# Altium PCB AMRadio.PcbDoc
Units mil, origin at the board's own origin, x right, y up, seen from the top; angles counter-clockwise.
Board outline 1080 x 3090 mil, 2 copper layers (Top Layer, Bottom Layer); 50 components, 30 nets, 125 pads, 27 vias.
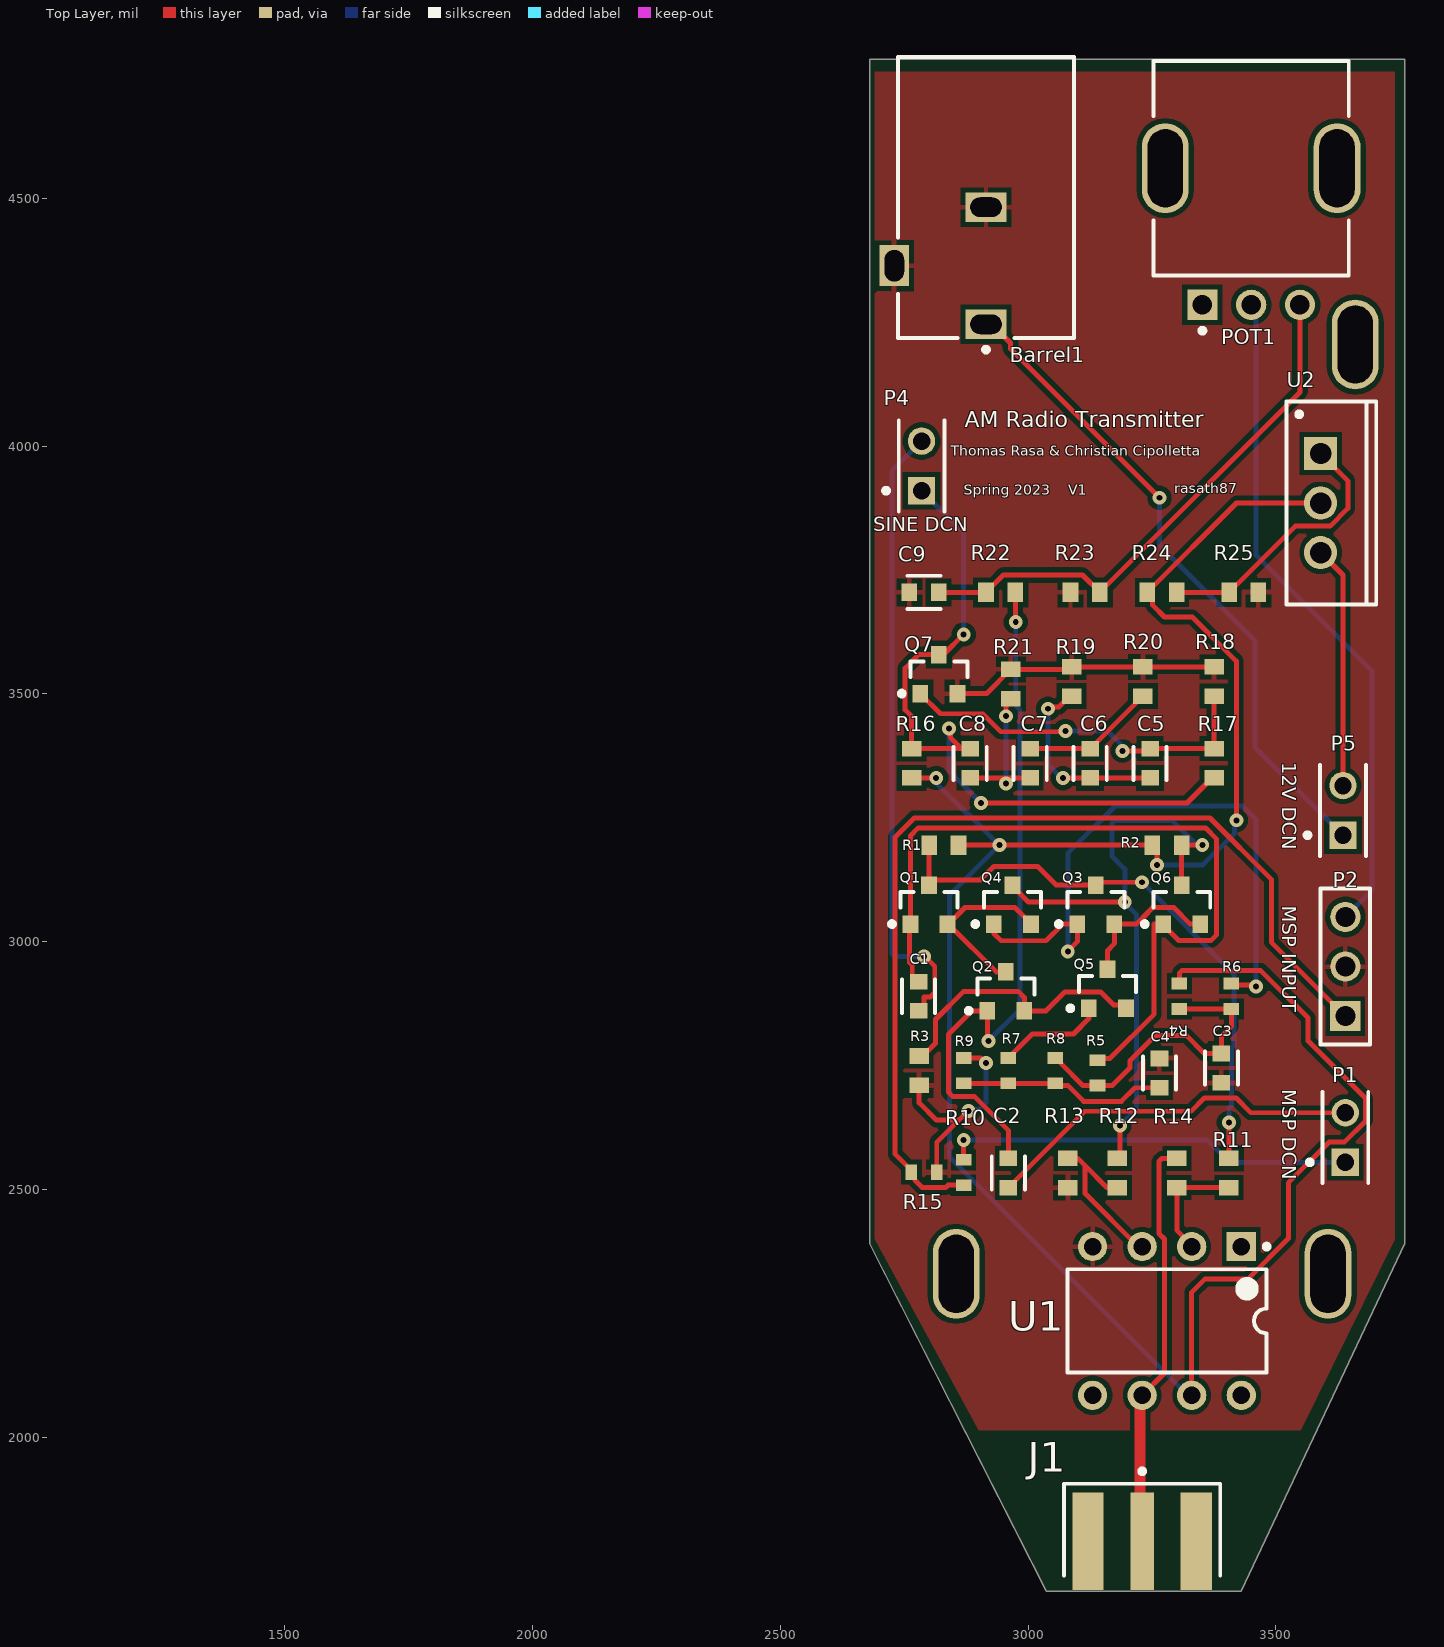
[diagram p0: Top Layer view]
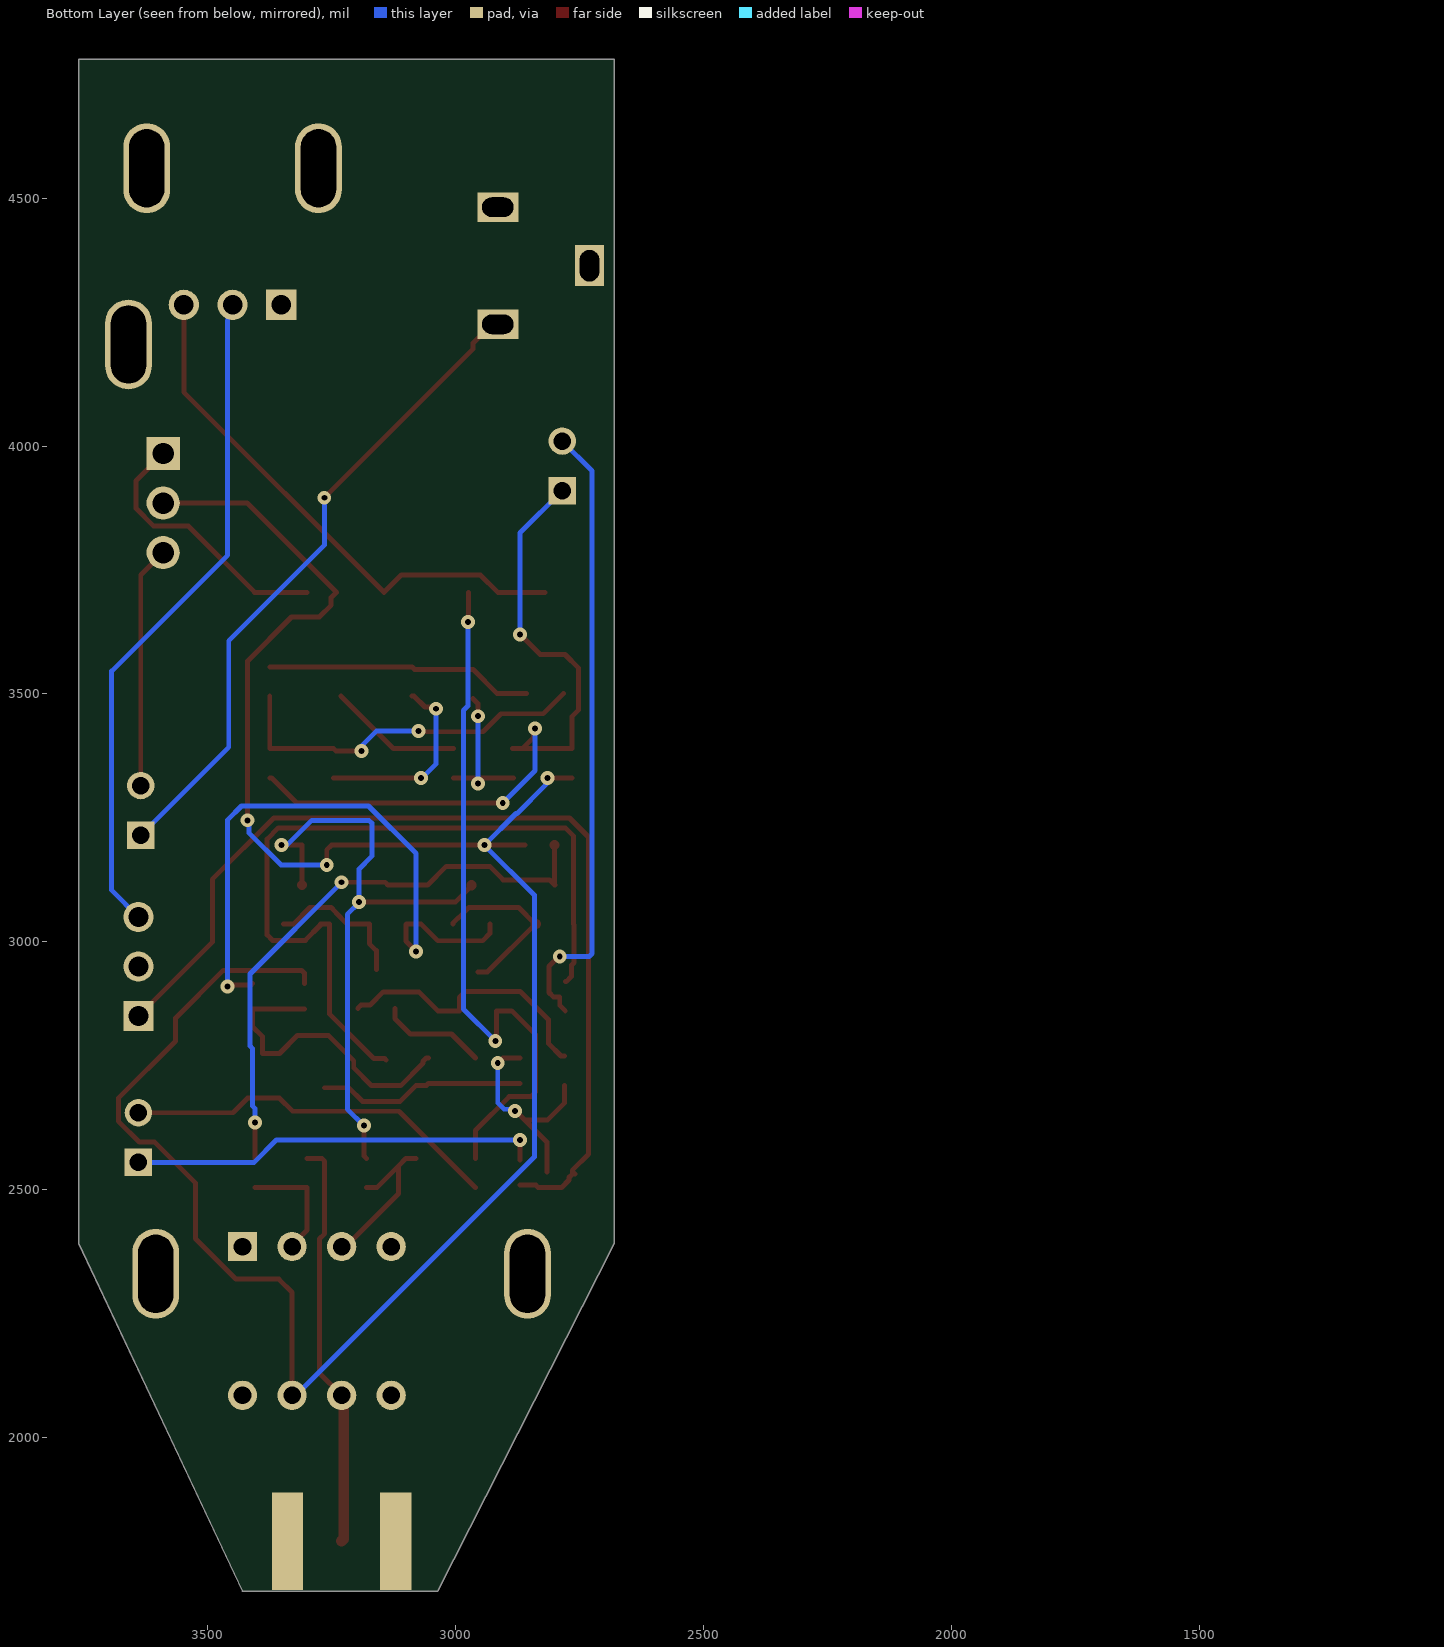
[diagram p1: Bottom Layer view, seen from below]

## Layer stack, top to bottom
Top Solder: solder mask 0.4, Solder Resist, Dk 3.5
Top Layer: signal copper 1.4
Dielectric 1: dielectric 12.6, FR-4, Dk 4.8
Bottom Layer: signal copper 1.4
Bottom Solder: solder mask 0.4, Solder Resist, Dk 3.5

## Board outline
2680,2391.1 3036.4,1690 3430.08,1690 3760,2391.1 3760,4780 2680,4780

## Design rules (kind name [scope] priority, off if disabled: settings)
Clearance [All] p1: gap=10 ignorepadtopadclearanceinfootprint=FALSE except(0: Arc-Hole Track-Hole SMDPad-Hole THPad-Hole Via-Hole Fill-Hole Poly-Hole Region-Hole Text-Hole; 8: Arc-THPad Track-THPad SMDPad-THPad THPad-THPad)
PolygonConnect [All] p1: connectstyle=Relief reliefconductorwidth=10 reliefentries=4 polygonreliefangle="90 Angle" airgapwidth=10
RoutingVias [All] p1: holewidth=12 width=28 viastyle="Through Hole" minholewidth=7.87 minwidth=26 maxholewidth=20 maxwidth=28
SilkToSilkClearance [All] p1: silktosilkclearance=2
SolderMaskExpansion [All] p1: expansion=4 istentingtop=FALSE
Width [All] p1: maxlimit=23.94 minlimit=10 preferedwidth=10 bottomlayer_maxwidth=20 minimp=50.000000 maximp=50.000000 favimp=50.000000
29 further rules are at their usual default settings.

## Components (designator, comment, footprint, x,y, rotation, side; value= is the part's Value field where it differs from the comment)
Barrel1 "PJ-102BH" CUI-PJ-102BH_V 2915,4363.82 r90 top
C1 "CC0603KRX7R8BB104" FP-CC0603-DA-MFG 2778.88,2890 r90 top value="100 nF"
C2 "CC0603KRX7R8BB104" FP-CC0603-DA-MFG 2960,2533.39 r90 top value="100 nF"
C3 "CC0603KRX7R8BB104" FP-CC0603-DA-MFG 3390,2745 r270 top value="100 nF"
C4 "CC0603KRX7R8BB104" FP-CC0603-DA-MFG 3265,2735 r90 top value="100 nF"
C5 "CC0603KRX7R8BB104" FP-CC0603-DA-MFG 3246.05,3360 r90 top value="100 nF"
C6 "CC0603KRX7R8BB104" FP-CC0603-DA-MFG 3125.05,3360 r270 top value="100 nF"
C7 "CC0603KRX7R8BB104" FP-CC0603-DA-MFG 3004.05,3360 r90 top value="100 nF"
C8 "CC0603KRX7R8BB104" FP-CC0603-DA-MFG 2883.05,3360 r90 top value="100 nF"
C9 "CC0603KRX7R8BB104" FP-CC0603-DA-MFG 2790,3705 r180 top value="100 nF"
J1 "CON-SMA-EDGE-S" FP-CON-SMA-EDGE-S-MFG 3230,1505 r180 top
P1 "5-146280-2" TECO-5-146280-2_V 3640,2605 r90 top
P2 "TSW-103-07-F-S" SMTC-TSW-103-07-X-S 3640,2850 r90 top
P4 "5-146280-2" TECO-5-146280-2_V 2785,3960 r90 top
P5 "5-146280-2" TECO-5-146280-2_V 3635.26,3265 r90 top
POT1 "PTV09A-4020U-B103" FP-PTV09A-4-MFG 3450,4560.59 r0 top value=10kΩ
Q1 "MMBT2222ALT1G" ONSC-SOT-23-3-318-08_V 2800,3075 r90 top
Q2 "MMBT2222ALT1G" ONSC-SOT-23-3-318-08_V 2955,2900 r90 top
Q3 "MMBT2222ALT1G" ONSC-SOT-23-3-318-08_V 3136.67,3075 r90 top
Q4 "MMBT2222ALT1G" ONSC-SOT-23-3-318-08_V 2968.33,3075 r90 top
Q5 "MMBT2222ALT1G" ONSC-SOT-23-3-318-08_V 3160,2905 r90 top
Q6 "MMBT2222ALT1G" ONSC-SOT-23-3-318-08_V 3310,3075 r90 top
Q7 "MMBT2222ALT1G" ONSC-SOT-23-3-318-08_V 2820,3540 r90 top
R1 "RC0603FR-07220RL" RESC1608X55X25ML10T15 2830,3195 r180 top
R2 "RC0603FR-07220RL" RESC1608X55X25ML10T15 3280,3195 r0 top
R3 "RC0603FR-07220RL" RESC1608X55X25ML10T15 2780,2740 r270 top
R4 "RC0603FR-072K4L" RESC1608X55X25LL10T15 3305,2890 r90 top
R5 "RC0603FR-072K4L" RESC1608X55X25LL10T15 3140,2735.59 r270 top
R6 "RC0603FR-072K4L" RESC1608X55X25LL10T15 3410,2890 r270 top
R7 "RC0603FR-072K4L" RESC1608X55X25LL10T15 2960,2740 r270 top
R8 "RC0603FR-072K4L" RESC1608X55X25LL10T15 3055,2740 r270 top
R9 "RC0603FR-072K4L" RESC1608X55X25LL10T15 2870,2740 r90 top
R10 "RC0603FR-072K4L" RESC1608X55X25LL10T15 2870,2534.41 r270 top
R11 "RC0603FR-07220RL" RESC1608X55X25ML10T15 3405,2533.39 r270 top
R12 "RC0603FR-07220RL" RESC1608X55X25ML10T15 3180,2533.39 r270 top
R13 "RC0603FR-07220RL" RESC1608X55X25ML10T15 3080,2533.39 r270 top
R14 "RC0603FR-07220RL" RESC1608X55X25ML10T15 3300,2533.39 r90 top
R15 "RC0603FR-072K4L" RESC1608X55X25LL10T15 2790,2535 r180 top
R16 "RC0603FR-07220RL" RESC1608X55X25ML10T15 2765,3360 r90 top
R17 "RC0603FR-07220RL" RESC1608X55X25ML10T15 3375,3360 r90 top
R18 "RC0603FR-07220RL" RESC1608X55X25ML10T15 3375,3525 r90 top
R19 "RC0603FR-07220RL" RESC1608X55X25ML10T15 3087.85,3525 r90 top
R20 "RC0603FR-07220RL" RESC1608X55X25ML10T15 3231.43,3525 r90 top
R21 "RC0603FR-07220RL" RESC1608X55X25ML10T15 2965,3520 r90 top
R22 "RC0603FR-07220RL" RESC1608X55X25ML10T15 2944.53,3705 r180 top
R23 "RC0603FR-07220RL" RESC1608X55X25ML10T15 3115,3705 r180 top
R24 "RC0603FR-07220RL" RESC1608X55X25ML10T15 3270,3705 r0 top
R25 "RC0603FR-07220RL" RESC1608X55X25ML10T15 3435,3705 r0 top
U1 "LM741CN/NOPB" P0008A 3280,2235 r270 top
U2 "LM317T" TO-220 3590,3885 r270 top

## Footprints (in the part's own frame and the unit in brackets; to place one, negate y for a bottom-side part, rotate by r counter-clockwise, add the part's x,y. Pads: shape width x height; smd on the part's side, far side on the other; paste and mask are expansions set on the pad)
CUI-PJ-102BH_V [mm] "THD, 3-Leads, Body 14.4x9mm, Height 11mm"
  rect 1.5x2.1 hole 1 slot 1.6 at 90 deg: 1(-3,0) 2(3,0)
  rect 2.1x1.5 hole 1 slot 1.6 at 0 deg: 3(0,4.7)
  silkscreen extent -4.42,-4.5 10.7,4.5, body extent -3.7,-4.5 10.7,4.9, height 11
FP-CC0603-DA-MFG [mm]
  rect 0.8x0.9 smd paste+0 mask+0: 1(-0.75,0) 2(0.75,0)
  silkscreen extent -0.85,-0.85 0.85,0.85, body extent -1.35,-0.75 1.35,0.75, height 0.25
FP-CON-SMA-EDGE-S-MFG [mm]
  rect 1.2x5 smd paste+0 mask+0: 1(0,-7.26)
  rect 1.6x5 smd paste+0 mask+0: 2(-2.77,-7.26) 3(2.77,-7.26)
  rect 1.6x5 smd far side paste+0 mask+0: 4(-2.77,-7.26) 5(2.77,-7.26)
  silkscreen extent -4,-10.96 4,-5.5, body extent -3.67,-9.86 3.67,4.86, height 0.25
FP-PTV09A-4-MFG [mm]
  rect 1.55x1.55 hole 1 paste-1000 mask+0: 1(-2.5,-7)
  round 1.55 hole 1 paste-1000 mask+0: 2(0,-7) 3(2.5,-7)
  rrect100% 2.4x4.6 hole 4 slot 1.8 at 0 deg paste-1000 mask+0: 4(-4.4,0) 5(4.4,0)
  silkscreen extent -5,-8.45 5,5.5, body extent -5.8,-7.88 5.8,5.6, height 0.25
ONSC-SOT-23-3-318-08_V [mm] "SOT23, 3-Leads, Body 2.92x1.3mm, Pitch 0.95mm"
  rect 0.9x0.8 smd: 1(-1,0.95) 2(-1,-0.95) 3(1,0)
  silkscreen extent -1.12,-1.46 0.65,2.02, body extent -0.65,-1.46 0.65,1.46, height 1.11
P0008A [mm] "DIP, 8-Leads, Body 10.15x6.6mm, Pitch 2.54mm"
  rect 1.5x1.5 hole 0.9: 1(-3.81,3.81)
  round 1.5 hole 0.9: 2(-3.81,1.27) 3(-3.81,-1.27) 4(-3.81,-3.81) 5(3.81,-3.81) 6(3.81,-1.27) 7(3.81,1.27) 8(3.81,3.81)
  silkscreen extent -3.93,-5.1 2.65,5.24, body extent -3.95,-5.07 3.95,5.07, height 5.08
RESC1608X55X25LL10T15 [mm] "Chip Resistor, 2-Leads, Body 1.60x0.80mm, IPC High Density"
  rect 0.6x0.8 smd: 1(-0.65,0) 2(0.65,0)
  body extent -0.85,-0.45 0.85,0.45, height 0.55
RESC1608X55X25ML10T15 [mm] "Chip Resistor, 2-Leads, Body 1.70x0.90mm, IPC Low Density"
  rect 0.8x1 smd: 1(-0.75,0) 2(0.75,0)
  body extent -0.85,-0.45 0.85,0.45, height 0.55
SMTC-TSW-103-07-X-S [mm] ".025 SQ Post Terminal Strip Assembly, 1x3 Pins, Vertical, 2.54mm Pitch, Male"
  rect 1.55x1.55 hole 1.02: 1(0,0)
  round 1.55 hole 1.02: 2(2.54,0) 3(5.08,0)
  silkscreen extent -1.46,-1.27 6.54,1.27, body extent -1.27,-1.27 6.35,1.27, height 8.38
TECO-5-146280-2_V [mm] "Connector, 2-Leads, Body 4.67x2.34mm, Pitch 2.54mm"
  rect 1.4x1.4 hole 0.89: 1(-1.27,0)
  round 1.4 hole 0.89: 2(1.27,0)
  silkscreen extent -2.34,-1.17 2.34,1.94, body extent -2.34,-1.17 2.34,1.17, height 5.33
TO-220 [mm] "TO, Thru-Hole, Vertical, Heatsink Mounted; 3 In-Line Leads; Pitch 2.54 mm"
  rect 1.7x1.7 hole 1.1: 1(-2.54,0)
  round 1.7 hole 1.1: 2(0,0) 3(2.54,0)
  silkscreen extent -5.2,-1.75 5.2,2.85, body extent -5.25,-1.8 5.25,2.9, height 19.7

## Part data
Barrel1: library part CMP-2000-06901-1, "Through Hole Right Angle DC Power Jack, 5 A, 2.5 mm Center Pin, 3 Position, -25 to 85 degC, RoHS, Bulk", Current Rating=5A, Flammability Rating=UL94V-0, Insulation Resistance=100MOhms, Manufacturer=CUIInc., Operating Temperature Range=-25Cto+85C, Package Description="3-Pin Through Hole Device, Body 14.4 x 9 mm, Height 11 mm", Voltage Rating=24V, Brand=CUI, Connector Type=DCPowerJack, Contact Gender=Male, Contact Material=Copper, Contact Plating=Nickel, Datasheet URL=http://www.cui.com/product/resource/pj-102bh.pdf, Datasheet Version="Rev. 1.02, 05/2016", Factory Pack Quantity=280, Housing Material=PolybutyleneTerephthalate(PBT), Inside Contact Diameter=2.5mm, Manufacturer URL=http://www.cui.com/, Mounting Angle=Right, Mounting Style=ThroughHole, Mounting Technology=ThroughHole, Outside Contact Diameter=6.5mm, Package Reference=PJ-102BH, Product=Jacks, Product Category=DCPowerConnectors, RoHS=True, Termination Style=ThroughHole
C1 C2 C3 C4 C5 C6 C7 C8 C9: library part CMP-03422-000234-1, "CAP CER 0.1UF 25V X7R 0603", Capacitance="100 nF", Manufacturer=YAGEO, Package=CC0603-DA, Temperature="-55°C to +125°C", Temperature Characteristic=X7R, Temperature Coefficient=15%, Temperature Range High=+125°C, Temperature Range Low=-55°C, Tolerance=0.1, Voltage="25 V", Automotive=No, Category=Cap, ComponentLink2Description=Datasheet, ComponentLink2URL=http://www.yageo.com/documents/recent/UPY-GPHC_X7R_6.3V-to-50V_18.pdf, Device Class L1="Passive Components", Device Class L2=Capacitors, Device Class L3="Ceramic Capacitors", Digikey Description="CAP CER 0.1UF 25V X7R 0603", Footprint Url=http://www.yageo.com/exep/pages/download/literatures/UPY-C_GEN_24.pdf, Height=0.9mm, Lead Free=Yes, Manufacturer Part Number=CC0603KRX7R8BB104, Material=Ceramic, Mouser Description="CC Series 0603 0.1 uF 25 V ±10% Tolerance X7R SMT Multilayer Ceramic Capacitor", Octopart=https://octopart.com/cc0603krx7r8bb104-yageo-8376534, RoHS=TRUE, Voltage Rating="25 V"
J1: library part CMP-204357-000001-1, "CONN SMA JACK STR EDGE MNT", Frequency=18GHz, Manufacturer="RF Solutions Ltd.", Package=CONN_JACK, Automotive=No, Category=Conn, ComponentLink2Description=Datasheet, ComponentLink2URL=https://www.rfsolutions.co.uk/downloads/1498648656DS-CON-EDGE-SMA-4.pdf, Conn Orientation="Right Angle", Contact Material=Gold, Device Class L1=Connectors, Device Class L2="RF / Coaxial Connectors", Device Class L3=unset, Digikey Description="CONN SMA JACK STR EDGE MNT", Footprint Url=https://forum.upverter.com/uploads/default/original/3X/b/e/be75b907af57498775929d6d9099689c472e0307.pdf, Height=6.35mm, Impedance=50Ω, Is Female=yes, Lead Free=Yes, Manufacturer Part Number=CON-SMA-EDGE-S, Number Of Contacts=1, Octopart=https://octopart.com/con-sma-edge-s-rf+solutions-70967450, RoHS=TRUE, Shielding=true
P1 P4 P5: library part CMP-2000-07492-1, "Male Header, Pitch 2.54 mm, 1 x 2 Position, Height 8.21 mm, Tail Length 3.05 mm, -65 to 105 degC, RoHS, Bulk", Case\/Package=100, Colour=Black, Current Rating=3A, Flammability Rating=UL94V-0, High Temperature Housing=Yes, Manufacturer="TE Connectivity", Max Current Rating=5A, Max Operating Temperature=105degC, Min Operating Temperature=-65degC, Package Description="Male Header, Pitch 2.54 mm, 1 x 2 Position, Height 8.21 mm, Tail Length 3.05 mm", Package Quantity=500, Approvals=CSA, Board Standoff=No(Without), Connector Type=Header, Contact Gender=Male, Contact Material=CopperAlloy, Contact Mating Length=0.23inch, Contact Plating=Matte, Contact Protection=No(Without), Contact Shape=Square, Datasheet URL=http://www.te.com/commerce/DocumentDelivery/DDEController?Action=showdoc&DocId=Customer+Drawing%7F146280%7FH1%7Fpdf%7FEnglish%7FENG_CD_146280_H1.pdf%7F5-146280-2, Datasheet Version="Rev. H1, 08/2016", Depth=2.34mm, Gasket=No(Without), High Speed Serial Data Connector=No, Housing Colour=Black, Housing Material=Polymer, Keyed=No, Length=4.67mm, Manufacturer URL=http://www.te.com/, Mating Alignment=No(Without), Mating Connector Lock=No(Without), Mating Post Length=0.23inch, Mount=ThroughHole, Mounting Technology=ThroughHole, Number Of Contacts=2, Number of Positions=2, Number Of Rows=1, Orientation=Straight, Package Reference=5-146280-2, Packaging=Carton, Panel Mount Retention=No(Without), PCB Mount Retention=Without, PCB Mounting Orientation=Vertical, PCB Thickness=0.063inch, Pitch=2.54mm, Radiation Hardening=No, RoHSCompliant=true, Row Spacing=2.54mm, Selectively Loaded=No(Without), Stabilizers=No(Without), Termination=ThroughHole, Termination Post Length=0.12inch
P2: library part CMP-1024-00331-1, "0.025\" SQ Post Header, Through-hole, Vertical, -55 to 125 degC, 2.54 mm Pitch, 3-Pin, Male, RoHS", Manufacturer=Samtec, Temperature Range="-55 to 125 degC", ComponentLink1Description="Manufacturer URL", ComponentLink1URL=http://www.samtec.com, ComponentLink2Description=Datasheet, ComponentLink2URL=http://www.samtec.com/documents/webfiles/pdf/TSW_TH.PDF, ComponentLink3Description="Package Specification", ComponentLink3URL=http://www.samtec.com/documents/webfiles/cpdf/TSW-XXX-XX-XXX-X-XX-XXX-MKT.pdf, DatasheetVersion=F-214, Mounting Technology=Through-hole, Orientation=Vertical, PackageDescription=".025[0.64] SQ. Post Terminal Strip Assembly", PackageReference=TSW-103-07-X-S, PackageVersion="DM, 8/1988", PartNumber=TSW-103-07-F-S, Pitch="2.54 mm", RoHS=True
POT1: library part CMP-07234-000013-1, "POT 10K OHM 1/20W CARBON LINEAR", Manufacturer="Bourns Inc.", Package=PTV09A-4, Power Rating=0.05W, Resistance=10kΩ, Temperature="-10°C to +50°C", Temperature Range High=+50°C, Temperature Range Low=-10°C, Tolerance=20%, Voltage Rating=50V, Automotive=No, Category=Res, ComponentLink2Description=Datasheet, ComponentLink2URL=https://www.bourns.com/docs/product-datasheets/ptv09.pdf?sfvrsn=5e1089f1_12, Composition=Carbon, Device Class L1="Passive Components", Device Class L2=Resistors, Device Class L3="Variable Resistors and Potentiometers", Digikey Description="POT 10K OHM 1/20W CARBON LINEAR", Height=20.5mm, Lead Free=Yes, Manufacturer Part Number=PTV09A-4020U-B103, Mouser Description="Potentiometers 10K LINEAR 20%", Octopart=https://octopart.com/ptv09a-4020u-b103-bourns-1878033, RoHS=TRUE, Series=PTV09
Q1 Q2 Q3 Q4 Q5 Q6 Q7: library part CMP-1048-00538-1, "General Purpose Transistor, NPN Silicon, 3-Pin SOT-23, Pb-Free, Tape and Reel", Manufacturer="On Semiconductor", ComponentLink1Description="Manufacturer URL", ComponentLink1URL=http://www.onsemi.com/, ComponentLink2Description=Datasheet, ComponentLink2URL=http://www.onsemi.cn/pub_link/Collateral/MMBT2222LT1-D.PDF, ComponentLink3Description="Package Specification", ComponentLink3URL=http://www.onsemi.cn/pub_link/Collateral/318-08.PDF, DatasheetVersion="Rev. 10", fT Min (MHz)=300, IC Continuous (A)=0.6, Mounting Technology="Surface Mount", PackageDescription="3-Pin Small Outline Transistor, Body 2.92 x 1.3 mm, Pitch 0.95 mm", PackageReference=SOT-23-3-318-08, PackageVersion="Rev. AP, 11/2009", Packing="Tape and Reel", PartNumber=MMBT2222ALT1G, Polarity=NPN, RoHS=TRUE
R1 R2 R3 R11 R12 R13 R14 R16 R17 R18 R19 R20 R21 R22 R23: library part CMP-1659-00018-2, "General Purpose Chip Resistors, 220 Ohm, +/- 1%, -55 to 155 degC, 0603 (1608 Metric), RoHS, Tape and Reel", ComponentLink1Description="Manufacturer URL", ComponentLink1URL=http://www.yageo.com/, ComponentLink2Description=Datasheet, ComponentLink2URL=https://datasheet.ciiva.com/11808/0900766b80f96399-11808136.pdf, DatasheetVersion="Rev. 4, 04/2009", PackageDescription="2-Pin Surface Mount Device, Body 1.6 x 0.8 mm", PackageReference=0603, RoHSCompliant=false
R4 R10 R15: library part CMP-2000-06935-1, "Chip Resistor, 4.7 kOhm, +/- 1%, 0.1 W, -55 to 155 degC, 0603 (1608 Metric), RoHS, Tape and Reel", Manufacturer=Yageo, Operating Temperature=-55°C~155°C, Package / Case=0603(1608Metric), Package Description="2-Pin Surface Mount Device, Body 1.6 x 0.8 mm", Package Reference=0603, Power (Watts)=0.1W,1/10W, Resistance (Ohms)=2.4k, Standard Package=1, Temperature Coefficient=±100ppm/°C, Tolerance=±1%, Catalog Drawings=ThickFilmResistorSide, Category=Resistors, Composition=ThickFilm, Datasheet URL=http://www.yageo.com/documents/recent/PYu-RC_Group_51_RoHS_L_7.pdf, Datasheet Version="Rev. 7, 05/2017", EDA / CAD Models=DownloadfromAcceleratedDesigns, Family=ChipResistor-SurfaceMount, Features=MoistureResistant, Height="0.022\"(0.55mm)", HTML Datasheet=RCSeries,LSuffixDatasheet.html, Kits=PHH4-KIT-ND-RESKIT1K-9.76K1/10W5700PCS, Manufacturer URL=http://www.yageo.com/, Mounting Technology=SurfaceMount, Number of Terminations=2, Online Catalog=RC0603Series, Other Names=311-2.40KHRCT, Packaging=CutTape(CT), PCN Other=RC/AC0603/0805/120622/Jan/2013, Product Training Modules=ChipResistor, Series=RC, Size / Dimension="0.063\"Lx0.031\"W(1.60mmx0.80mm)", Supplier Device Package=0603
R5 R6 R7 R8 R9: library part CMP-2000-06935-1, "Chip Resistor, 2.4 kOhm, +/- 1%, 0.1 W, -55 to 155 degC, 0603 (1608 Metric), RoHS, Tape and Reel", Manufacturer=Yageo, Operating Temperature=-55°C~155°C, Package / Case=0603(1608Metric), Package Description="2-Pin Surface Mount Device, Body 1.6 x 0.8 mm", Package Reference=0603, Power (Watts)=0.1W,1/10W, Resistance (Ohms)=2.4k, Standard Package=1, Temperature Coefficient=±100ppm/°C, Tolerance=±1%, Catalog Drawings=ThickFilmResistorSide, Category=Resistors, Composition=ThickFilm, Datasheet URL=http://www.yageo.com/documents/recent/PYu-RC_Group_51_RoHS_L_7.pdf, Datasheet Version="Rev. 7, 05/2017", EDA / CAD Models=DownloadfromAcceleratedDesigns, Family=ChipResistor-SurfaceMount, Features=MoistureResistant, Height="0.022\"(0.55mm)", HTML Datasheet=RCSeries,LSuffixDatasheet.html, Kits=PHH4-KIT-ND-RESKIT1K-9.76K1/10W5700PCS, Manufacturer URL=http://www.yageo.com/, Mounting Technology=SurfaceMount, Number of Terminations=2, Online Catalog=RC0603Series, Other Names=311-2.40KHRCT, Packaging=CutTape(CT), PCN Other=RC/AC0603/0805/120622/Jan/2013, Product Training Modules=ChipResistor, Series=RC, Size / Dimension="0.063\"Lx0.031\"W(1.60mmx0.80mm)", Supplier Device Package=0603
R24: library part CMP-1659-00018-2, "General Purpose Chip Resistors, 560 Ohm, +/- 1%, -55 to 155 degC, 0603 (1608 Metric), RoHS, Tape and Reel", ComponentLink1Description="Manufacturer URL", ComponentLink1URL=http://www.yageo.com/, ComponentLink2Description=Datasheet, ComponentLink2URL=https://datasheet.ciiva.com/11808/0900766b80f96399-11808136.pdf, DatasheetVersion="Rev. 4, 04/2009", PackageDescription="2-Pin Surface Mount Device, Body 1.6 x 0.8 mm", PackageReference=0603, RoHSCompliant=false
R25: library part CMP-1659-00018-2, "General Purpose Chip Resistors, 5000 Ohm, +/- 1%, -55 to 155 degC, 0603 (1608 Metric), RoHS, Tape and Reel", ComponentLink1Description="Manufacturer URL", ComponentLink1URL=http://www.yageo.com/, ComponentLink2Description=Datasheet, ComponentLink2URL=https://datasheet.ciiva.com/11808/0900766b80f96399-11808136.pdf, DatasheetVersion="Rev. 4, 04/2009", PackageDescription="2-Pin Surface Mount Device, Body 1.6 x 0.8 mm", PackageReference=0603, RoHSCompliant=false
U1: library part CMP-0055-00162-3, "Operational Amplifier, 8-pin MDIP, Pb-Free", Manufacturer="Texas Instruments", Package Reference=P0008A, PackageTopMarking=NSUZXYTTE#*LM*741CN, PowerWise=N, Code_JEDEC=MS-001-BA, ComponentLink1Description="Datasheet URL", ComponentLink1URL=http://www.ti.com/general/docs/lit/getliterature.tsp?genericPartNumber=LM741&fileType=pdf, CompType=Amplifiers, PackageDescription="MDIP, .365 x .250 x .130in, 8 Lead, .100in Pitch", PinCount=8, RoHS=Y
U2: library part CMP-0244-00444-1, "1.5A, 1.2V to 37V Adjustable Voltage Regulator, 3-Pin TO-220", ComponentLink1Description="Manufacturer URL", ComponentLink1URL=http://www.st.com, ComponentLink2Description=Datasheet, ComponentLink2URL=http://www.st.com/internet/com/TECHNICAL_RESOURCES/TECHNICAL_LITERATURE/DATASHEET/CD00000455.pdf, ComponentLink3Description="Package Specification", ComponentLink3URL=http://www.st.com/internet/com/TECHNICAL_RESOURCES/TECHNICAL_LITERATURE/PACKAGE_INFORMATION/CD00004649.pdf, DatasheetVersion=1/11/2011, PackageDescription="TO, Thru-Hole, Vertical, Heatsink Mounted; 3 In-Line Leads; Pitch 2.54 mm", PackageReference=TO-220, PackageVersion=2011

## Free pads (board coordinates)
  rrect100% 94.49x181.1 hole 157.48 slot 70.87 at 0 deg paste-39370.1 mask+0: 2(2855,2330) 2(3605,2330) 2(3660,4205)

## Via types
v1: diameter 28, hole 12, Top Layer to Bottom Layer, 27 vias

## Nets (pads, with @x,y where several pads share a name; then routed paths per layer and width w, separated by ;. In a path a pad name is that pad's centre, name@x,y a point inside that pad or via, vN(x,y) a via of type N, cw(c..) or ccw(c..) an arc to the next point about the centre after c; other vN are vias at no path point)
5V: P2.3 POT1.2 | length 1358.4
  Bottom Layer w10: POT1.2 3459.76,4275.24 3459.76,4253.87 3460,4253.63 3460,3780 3693.95,3546.05 3693.95,3103.95 P2.3
+12: R1.1 R2.1 R4.2 R16.1 R24.1 U1.7 U2.2 | length 4581
  Top Layer w10: R16.1 v1(2814.53,3330.47) ; R1.1 v1(2942,3195) R2.1 3260,3185.47 v1(3260,3155) ; R4.2 3305,2936.54 3310.86,2942.4 3468.61,2942.4 3565,2846.01 3565,2799.89 3680.56,2684.33 3680.56,2638.2 3637.92,2595.56 3607.06,2595.56 3525.11,2513.61 3525.11,2401.32 3443.16,2319.38 3356.56,2319.38 3330,2292.81 U1.7 ; v1(3420,3245) 3420,3566.17 3331.17,3655 3275,3655 3251.06,3678.94 3251.06,3694.41 R24.1 3420.47,3885 U2.2
  Bottom Layer w10: v1(2814.53,3330.47) 2817.97,3327.03 2817.97,3316.74 2875.9,3258.81 2878.19,3258.81 v1(2942,3195) 2841,3094 2841,2566.07 3322.07,2085 U1.7 ; v1(3260,3155) 3352.37,3155 3416.56,3219.19 3416.56,3241.56 v1(3420,3245)
broadMSP: P2.1 R10.2 R15.2 | length 1986.7
  Top Layer w10: R10.2 2838.18,2508.82 2833.61,2504.25 2786.22,2504.25 2771.22,2519.25 2771.22,2524.25 2764.41,2531.06 2759.41,2531.06 2763.35,2535 R15.2 2764.41,2538.94 2731.85,2571.5 2731.85,3211.31 2770.23,3249.69 3366.97,3249.69 3490.73,3125.92 3490.73,2999.27 P2.1
DIFF_1: Q1.3 Q3.3 R1.2 R11.1 | length 1181.9
  Top Layer w10: Q1.3 Q1.3@2800.24,3114.61 ; R1.2@2800.24,3194.76 Q1.3@2800.24,3114.61 ; v1(3230,3120) 3142.3,3120 Q3.3 3056.47,3114.37 3018.75,3152.09 2931.11,3152.09 2904.02,3125 2810.63,3125 Q1.3@2800.24,3114.61 ; R11.1 v1(3405,2635)
  Top Layer w20: R1.2@2800.24,3194.76 R1.2
  Bottom Layer w10: v1(3230,3120) 3415,2935 3415,2789.94 3410,2784.94 3410,2669 3405,2664 v1(3405,2635)
DIFF_2: Q4.3 Q6.3 R2.2 R12.1 | length 1287.3
  Top Layer w10: Q4.3@2968.33,3113.85 2968.33,3112.4 3000.74,3080 v1(3195,3080) ; R12.1 3185,2567.91 v1(3185,2629) ; Q6.3@3309.76,3114.61 3309.53,3114.84 R2.2 v1(3351.35,3195)
  Top Layer w20: Q4.3@2968.33,3113.85 Q4.3 ; Q6.3@3309.76,3114.61 Q6.3
  Bottom Layer w10: v1(3185,2629) 3218.39,2662.39 3218.39,3055.31 3195,3078.7 3195,3146.58 3169.14,3172.44 3169.14,3239.14 3175,3245 3290,3245 3345.68,3189.32 v1(3351.35,3195)
GND: Barrel1.2 Barrel1.3 C3.2 C4.2 C9.2 P2.2 Q7.2 R3.2 R9.2 R13.2 R15.1 R18.2 R19.2 R20.2 R21.2 R23.2 R25.2 U1.4 | length 992.2
  Top Layer w10: R3.2 2780,2675 2815,2640 2860,2640 ; R15.1 2815.59,2595.59 2860,2640 ; Q7.2 2916.1,3500.63 R21.2 3082.85,3549.53 R19.2 R20.2 R18.2 ; R9.2 2904.41,2765.59 v1(2915,2755) ; v1(2880,2658.6) 2878.6,2658.6 2860,2640
  Bottom Layer w10: v1(2880,2658.6) 2883.44,2662.04 2902.04,2662.04 2915,2675 v1(2915,2755)
MSP: C2.1 P1.2 | length 767.2
  Top Layer w10: C2.1 3114.14,2658 3328.81,2658 3355.53,2684.72 3419.5,2684.72 3449.23,2655 P1.2
NetBarrel1_1: Barrel1.1 P5.1 | length 1336
  Top Layer w10: Barrel1.1 2926.81,4245.71 2964.53,4207.99 2964.53,4196.18 v1(3265,3895.71)
  Bottom Layer w10: v1(3265,3895.71) 3265,3800 3457.77,3607.23 3457.77,3392.48 P5.1
NetC1_1: C1.1 P4.2 | length 1269.7
  Top Layer w10: C1.1 2790,2871.59 2790,2888.78 2802.81,2888.78 2811.59,2897.57 2811.59,2950.28 2790,2971.87 v1(2790,2970)
  Bottom Layer w10: P4.2 2725,3950 2725,2975.86 2730.86,2970 v1(2790,2970)
NetC1_2: C1.2 Q1.1 Q6.1 R5.1 | length 1610.1
  Top Layer w10: C1.2 2776.91,2919.53 2766.16,2930.28 2766.16,2952.83 2761,2957.99 2761,3034.03 Q1.1 2762.6,3213.77 2778.51,3229.69 3357.68,3229.69 3380.35,3207.01 3380.35,3013.9 3369.36,3002.91 3303.35,3002.91 3272.6,3033.66 Q6.1 3254.25,3035.63 3254.25,2853.84 3164.89,2764.48 3143.3,2764.48 R5.1
NetC2_2: C2.2 Q2.1 R22.1 | length 1421.2
  Top Layer w10: v1(2920,2800) 2917.6,2802.4 Q2.1 2886.85,2860.63 2839.25,2813.03 2839.25,2696.39 2848.04,2687.6 2892.01,2687.6 2960,2619.61 C2.2 ; R22.1 2974.06,3645.94 v1(2975,3645)
  Bottom Layer w10: v1(2920,2800) 2984,2864 2984,3467.01 2975,3476.01 v1(2975,3645)
NetC3_1: C3.1 R4.1 R5.2 R6.2 R8.1 | length 628.6
  Top Layer w10: R8.1 3058.94,2765.59 3065.75,2758.78 3065.75,2754.84 3110.8,2709.79 R5.2@3139.79,2709.79 ; R5.2 3170,2710 3205.54,2745.54 3205.54,2759.74 3256.79,2811 3319,2811 3355.47,2774.53 C3.1 3390,2809 3410,2829 R6.2 R4.1
NetC4_1: C4.1 R7.2 R8.2 R9.1 | length 421.5
  Top Layer w10: R9.1 R7.2 R8.2 3059.09,2710.32 3079.68,2710.32 3112,2678 3188,2678 3215.47,2705.47 C4.1
NetC5_1: C5.1 C6.2 R19.1 | length 388.2
  Top Layer w10: v1(3040,3470) 3043.44,3473.44 3061.89,3473.44 3083.92,3495.47 R19.1 ; v1(3070,3330) 3124.57,3330 C6.2 3246,3330.43 C5.1
  Bottom Layer w10: v1(3040,3470) 3040,3358.08 3068.08,3330 v1(3070,3330)
NetC5_2: C5.2 Q7.1 R17.2 R18.1 | length 740.2
  Top Layer w10: Q7.1 2823.23,3460 2908.53,3460 2944.91,3423.62 3073.62,3423.62 v1(3075,3425) ; v1(3190,3385) 3241.52,3385 C5.2 R17.2 R18.1
  Bottom Layer w10: v1(3075,3425) 3160,3425 v1@3186.56,3398.44
NetC6_1: C6.1 C7.2 R20.1 | length 271.3
  Top Layer w10: C7.2 C6.1 3125.48,3389.53 R20.1
NetC7_1: C7.1 C8.1 R21.1 | length 308.1
  Top Layer w10: C8.1 v1@2955,3330.47 ; v1(2955,3319) v1@2955,3330.47 ; v1(2955,3455) 2955,3480.47 R21.1 ; C7.1 2990.47,3330.47 v1@2955,3330.47
  Bottom Layer w10: v1(2955,3319) v1(2955,3455)
NetC8_2: C8.2 P4.1 Q7.3 R16.2 R17.1 | length 1478.2
  Top Layer w10: v1(2840,3430) 2843.44,3426.56 2843.44,3411.56 C8.2@2865.47,3389.53 ; v1(2870,3620) 2829.37,3579.37 Q7.3 2779.37,3579.37 2751.85,3551.85 2751.85,3467.91 2765,3454.76 R16.2 C8.2@2865.47,3389.53 ; C8.2@2885.02,3389.53 C8.2@2865.47,3389.53 ; v1(2905,3280) 3320.59,3280 3371.06,3330.47 R17.1
  Bottom Layer w10: P4.1 2870,3825 v1(2870,3620) ; v1(2840,3430) 2840,3345 v1(2905,3280)
NetC9_1: C9.1 POT1.3 R22.2 R23.1 | length 1101.3
  Top Layer w10: C9.1 R22.2 2950,3740 3109.53,3740 R23.1 3548.43,4108.9 POT1.3
NetP1_1: P1.1 R10.1 | length 828.6
  Top Layer w10: R10.1 v1(2870,2600)
  Bottom Layer w10: v1(2870,2600) 3361.62,2600 3406.62,2555 P1.1
NetP5_2: P5.2 U2.3 | length 488.7
  Top Layer w10: U2.3 3635.26,3739.74 P5.2
NetQ1_2: Q1.2 Q2.3 Q4.2 | length 352.6
  Top Layer w10: Q2.3 2935.63,2939.37 2839.37,3035.63 2872.74,3069 2973.27,3069 2993.93,3048.35 2994.99,3048.35 3005.73,3037.6 Q4.2
  Top Layer w20: Q1.2 Q1.2@2839.37,3035.63
NetQ2_2: Q2.2 Q5.2 R3.1 | length 561.4
  Top Layer w10: R3.1 2787.53,2769.53 2813,2795 2813,2843 2870,2900 2980,2900 2992.4,2887.6 Q2.2 3036,2860.63 3074.37,2899 3146,2899 3172.51,2872.49 3190.54,2872.49 Q5.2
NetQ3_1: Q3.1 Q4.1 R6.1 | length 1289.4
  Top Layer w10: Q4.1 2930.93,3016.61 2945.55,3002 3036,3002 3069.63,3035.63 Q3.1 3100,3034.9 3100,3001.01 3080,2981.01 v1(3080,2980) ; R6.1 3412.8,2912.8 3457.2,2912.8 v1(3460,2910)
  Bottom Layer w10: v1(3080,2980) 3080,3178.28 3175.72,3274 3432.01,3274 3460,3246.01 v1(3460,2910)
NetQ3_2: Q3.2 Q5.3 Q6.2 | length 298.4
  Top Layer w10: Q5.3 3160,2982 3174.07,2996.07 Q3.2 3218.42,3035.63 3241.85,3059.06 3241.85,3059.56 3251.29,3069 3294,3069 3327.37,3035.63 Q6.2
NetQ5_1: Q5.1 R7.1 | length 216.1
  Top Layer w10: R7.1 3008.41,2814 3091.6,2814 3122.6,2845 Q5.1
NetR11_2: R11.2 R14.1 U1.2 | length 236.3
  Top Layer w10: U1.2 3330,2387.97 3300,2417.97 R14.1 R11.2
NetR12_2: R12.2 R13.1 U1.3 | length 339.7
  Top Layer w10: R13.1 3100,2562.91 3115,2547.91 ; R12.2 3159.06,2503.86 3115,2547.91 ; U1.3 3222.07,2385 3115,2492.07 3115,2547.91
NetR24_2: R24.2 R25.1 U2.1 | length 549.1
  Top Layer w10: R24.2 R25.1 3539.01,3838.54 3609.25,3838.54 3645,3874.29 3645,3930 U2.1
RF_OUT: J1.1 R14.2 U1.6 | length 831
  Top Layer w10: U1.6 3275,2130 3275,2400.14 3264.14,2411 3264.14,2557.06 3270,2562.91 R14.2
  Top Layer w21.81: J1.1 3225.91,1794.92 3225.91,2080.91 U1.6
pads on no net: J1.2 J1.3 J1.4 J1.5 POT1.1 POT1.4 POT1.5 U1.1 U1.5 U1.8

## Polygon pours and split planes (outlines as drawn)
GND on Top Layer "GND_L01_P000" (solid, remove dead copper, pour order 0): 2690.29,4755 2690.29,2400.79 2900,2014.18 3550.19,2014.18 3740,2400 3740,4755

## Other copper
Top Layer:
  region: 1085,2500
  region: 1085,2500

## Silkscreen, mask and mechanical layers (free items; w line width, h text height)
Top Overlay:
  text "AM Radio Transmitter" at 2871.96,4037.87 h32.44
  text "Thomas Rasa & Christian Cipolletta" at 2843.94,3980.81 h20.63
  text "rasath87" at 3295.12,3905.12 h20.63
  text "Spring 2023    V1" at 2870.12,3901.99 h20.63
  text "SINE DCN" at 2687.87,3827.87 h28.5
  text "12V DCN" at 3512.87,3362.13 h28.5 r270
  text "MSP INPUT" at 3512.87,3072.13 h28.5 r270
  text "MSP DCN" at 3512.87,2702.13 h28.5 r270

## Dimensions
2680,4780 to 3760,4780 on Bottom Layer